# Altium PCB PCB_ControlDevBoard_2024-04-11.pcbdoc
Units mil, origin at the board's own origin, x right, y up, seen from the top; angles counter-clockwise.
Board outline 5143.85 x 4159.6 mil, 2 copper layers (Top Layer, Bottom Layer); 32 components, 65 nets, 148 pads, 4 vias.
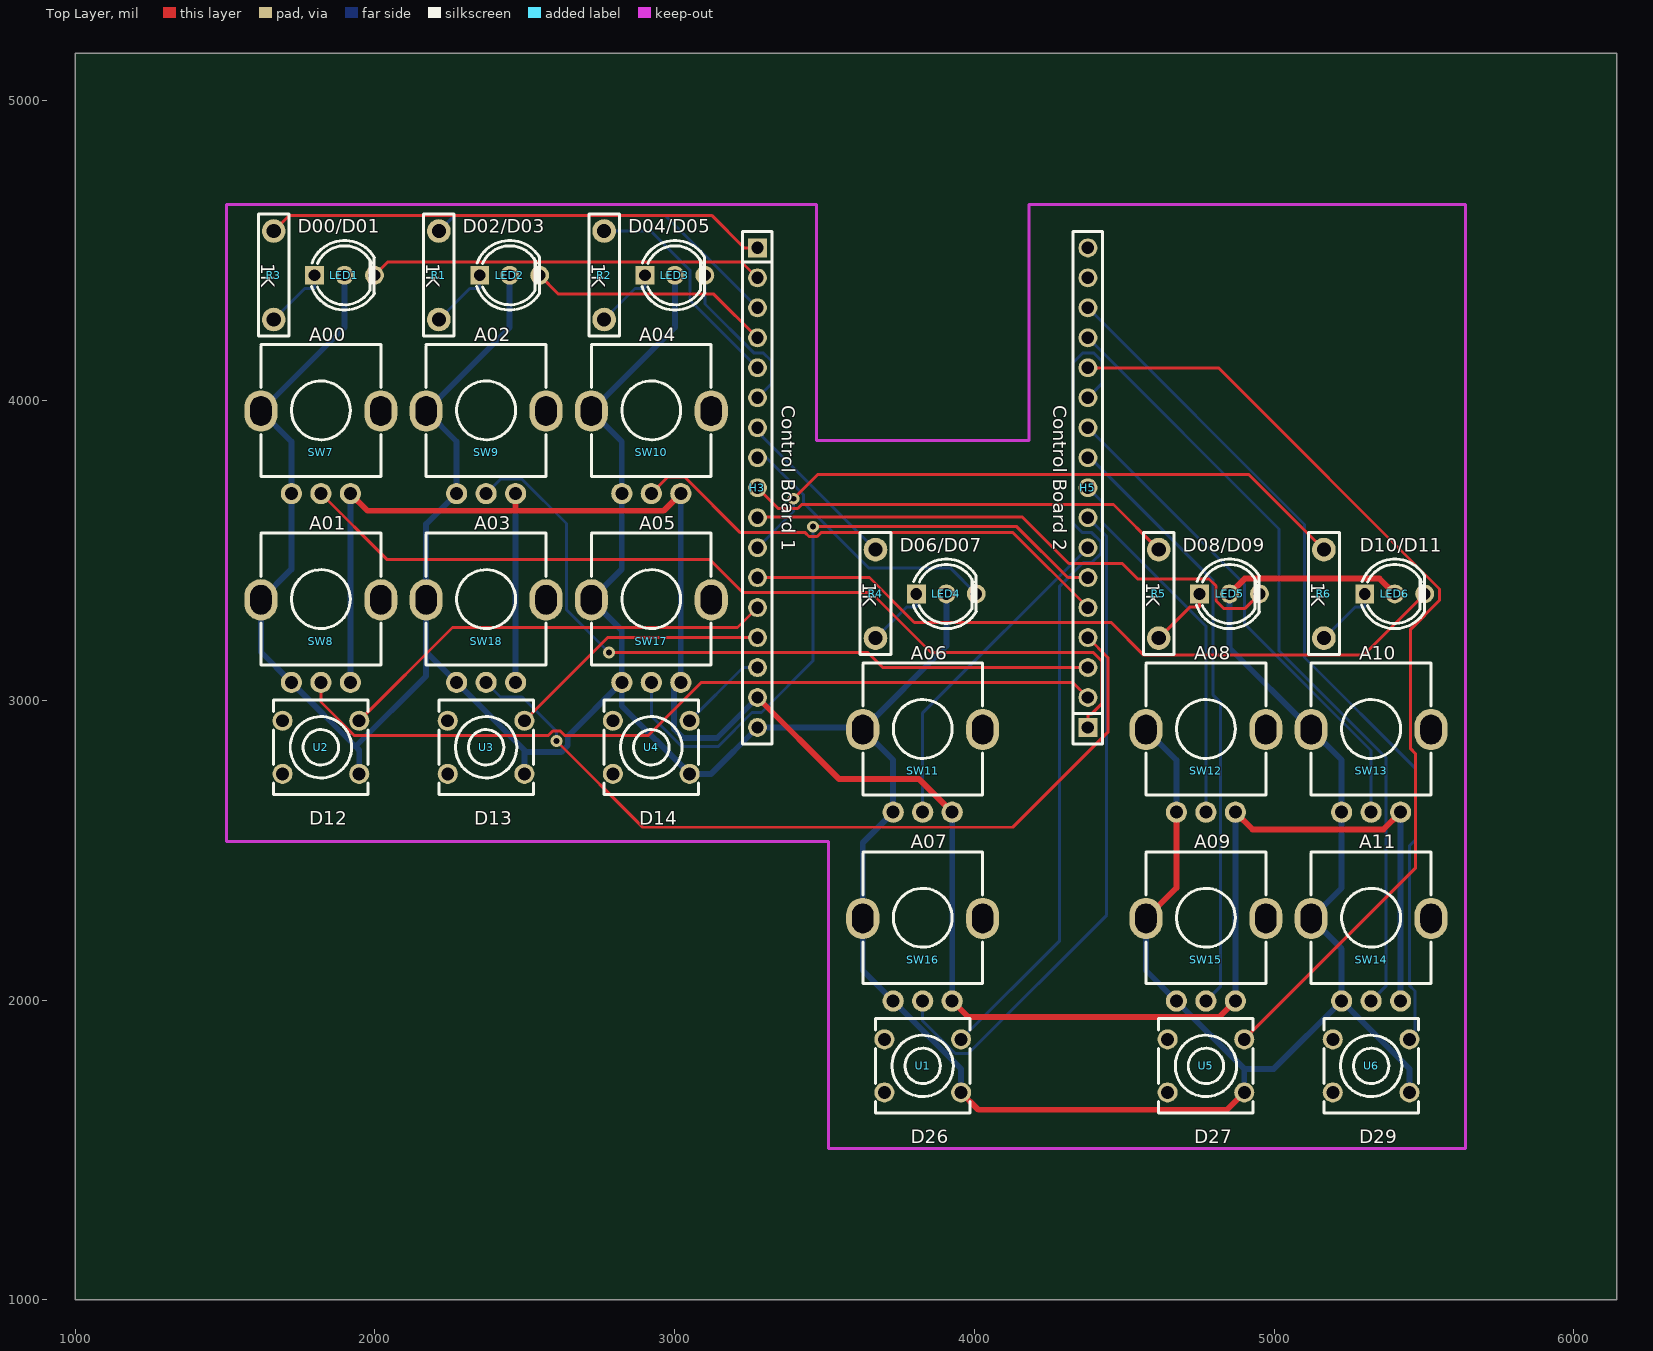
[diagram p0: Top Layer view]
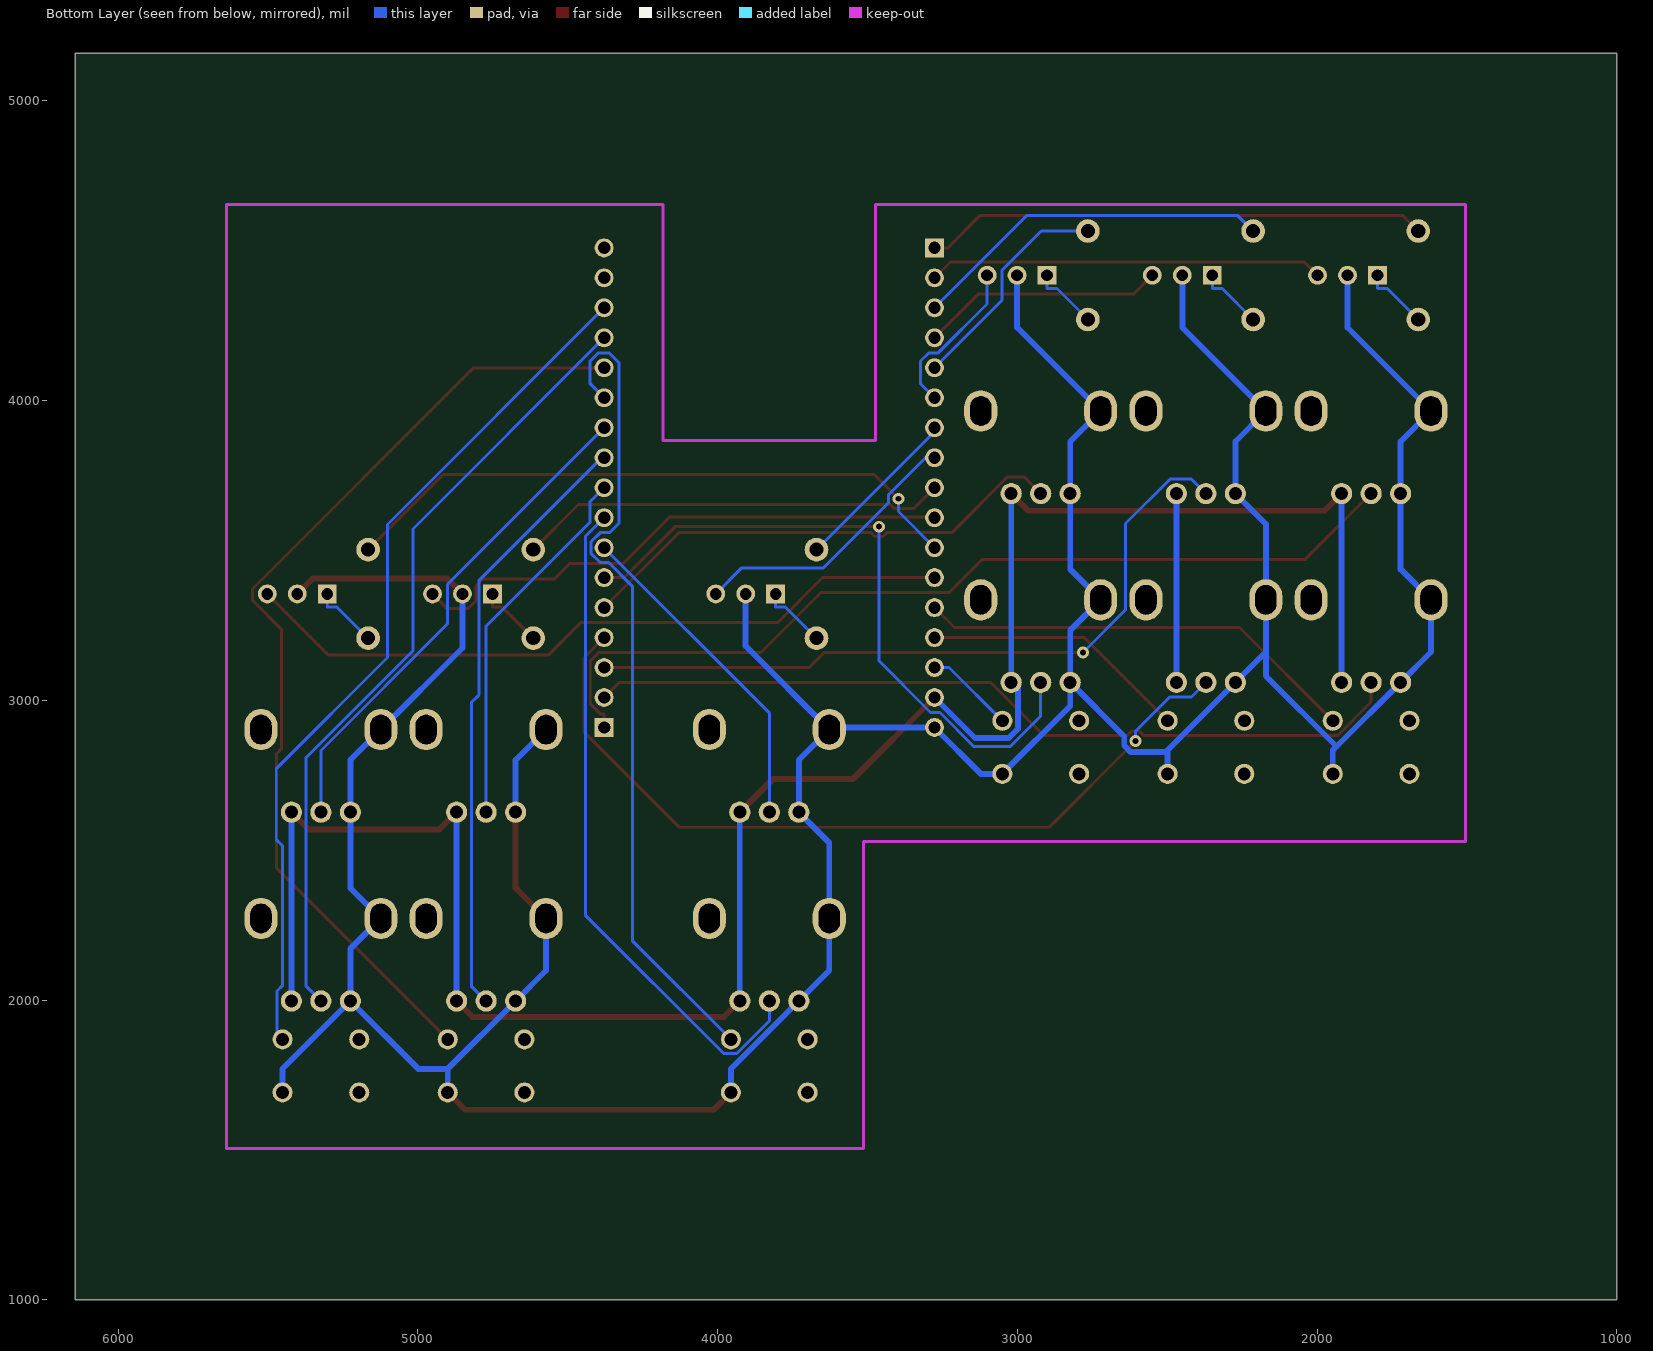
[diagram p1: Bottom Layer view, seen from below]

## Layer stack, top to bottom
Top Solder: solder mask 0.4, Solder Resist, Dk 3.5
Top Layer: signal copper 1.4
Dielectric1: dielectric 12.6, FR-4, Dk 4.8
Bottom Layer: signal copper 1.4
Bottom Solder: solder mask 0.4, Solder Resist, Dk 3.5

## Board outline
6143.85,1000 1000,1000 1000,5159.6 6143.85,5159.6

## Design rules (kind name [scope] priority, off if disabled: settings)
Clearance [All] p1: gap=10 ignorepadtopadclearanceinfootprint=FALSE except(0: Arc-Hole Track-Hole SMDPad-Hole THPad-Hole Via-Hole Fill-Hole Poly-Hole Region-Hole Text-Hole)
PolygonConnect [All] p1: connectstyle=Relief reliefconductorwidth=10 reliefentries=4 polygonreliefangle="90 Angle" airgapwidth=10
RoutingVias [All] p1: holewidth=28 width=50 viastyle="Through Hole" minholewidth=28 minwidth=50 maxholewidth=28 maxwidth=50
SolderMaskExpansion [All] p1: expansion=4 istentingtop=FALSE
Width [All] p1: maxlimit=10 minlimit=10 preferedwidth=10
30 further rules are at their usual default settings.

## Components (designator, comment, footprint, x,y, rotation, side; value= is the part's Value field where it differs from the comment)
H3 "Control Board 1" HDR-TH_17P-P2.54-V-M 3276.65,3709.72 r270 top
H5 "Control Board 2" HDR-TH_17P-P2.54-V-M 4379.01,3709.72 r90 top
LED1 "D00/D01" LED-TH_3P-BD5.9-P2.54-BI 1898.7,4418.38 r0 top
LED2 "D02/D03" LED-TH_3P-BD5.9-P2.54-BI 2449.88,4418.38 r0 top
LED3 "D04/D05" LED-TH_3P-BD5.9-P2.54-BI 3001.06,4418.38 r0 top
LED4 "D06/D07" LED-TH_3P-BD5.9-P2.54-BI 3906.57,3355.39 r0 top
LED5 "D08/D09" LED-TH_3P-BD5.9-P2.54-BI 4851.45,3355.39 r0 top
LED6 "D10/D11" LED-TH_3P-BD5.9-P2.54-BI 5402.63,3355.39 r0 top
R1 "1K" PS-RES-16.5*6.42 2213.66,4418.38 r270 top
R2 "1K" PS-RES-16.5*6.42 2764.84,4418.38 r270 top
R3 "1K" PS-RES-16.5*6.42 1662.48,4418.38 r270 top
R4 "1K" PS-RES-16.5*6.42 3670.35,3355.39 r270 top
R5 "1K" PS-RES-16.5*6.42 4615.23,3355.39 r270 top
R6 "1K" PS-RES-16.5*6.42 5166.41,3355.39 r270 top
SW7 "A00" RES-ADJ-TH_RK09D1130C4G 1819.96,3827.83 r0 top
SW8 "A01" RES-ADJ-TH_RK09D1130C4G 1819.96,3197.91 r0 top
SW9 "A02" RES-ADJ-TH_RK09D1130C4G 2371.14,3827.83 r0 top
SW10 "A04" RES-ADJ-TH_RK09D1130C4G 2922.32,3827.83 r0 top
SW11 "A06" RES-ADJ-TH_RK09D1130C4G 3827.83,2764.84 r0 top
SW12 "A08" RES-ADJ-TH_RK09D1130C4G 4772.71,2764.84 r0 top
SW13 "A10" RES-ADJ-TH_RK09D1130C4G 5323.89,2764.84 r0 top
SW14 "A11" RES-ADJ-TH_RK09D1130C4G 5323.89,2134.92 r0 top
SW15 "A09" RES-ADJ-TH_RK09D1130C4G 4772.71,2134.92 r0 top
SW16 "A07" RES-ADJ-TH_RK09D1130C4G 3827.83,2134.92 r0 top
SW17 "A05" RES-ADJ-TH_RK09D1130C4G 2922.32,3197.91 r0 top
SW18 "A03" RES-ADJ-TH_RK09D1130C4G 2371.14,3197.91 r0 top
U1 "D26" SW-TH_4P-L8.0-W8.0-P6.50-LS4.5 3827.83,1780.59 r0 top
U2 "D12" SW-TH_4P-L8.0-W8.0-P6.50-LS4.5 1819.96,2843.58 r0 top
U3 "D13" SW-TH_4P-L8.0-W8.0-P6.50-LS4.5 2371.14,2843.58 r0 top
U4 "D14" SW-TH_4P-L8.0-W8.0-P6.50-LS4.5 2922.32,2843.58 r0 top
U5 "D27" SW-TH_4P-L8.0-W8.0-P6.50-LS4.5 4772.71,1780.59 r0 top
U6 "D29" SW-TH_4P-L8.0-W8.0-P6.50-LS4.5 5323.89,1780.59 r0 top

## Footprints (in the part's own frame and the unit in brackets; to place one, negate y for a bottom-side part, rotate by r counter-clockwise, add the part's x,y. Pads: shape width x height; smd on the part's side, far side on the other; paste and mask are expansions set on the pad)
HDR-TH_17P-P2.54-V-M [mm]
  rect 1.6x1.6 hole 1.05 paste+0 mask+0.051: 1(-20.32,0)
  round 1.6 hole 1.05 paste+0 mask+0.051: 2(-17.78,0) 3(-15.24,0) 4(-12.7,0) 5(-10.16,0) 6(-7.62,0) 7(-5.08,0) 8(-2.54,0) 9(0,0) 10(2.54,0) 11(5.08,0) 12(7.62,0) 13(10.16,0) 14(12.7,0) 15(15.24,0) 16(17.78,0) 17(20.32,0)
  silkscreen extent -21.71,-1.25 21.71,1.25
LED-TH_3P-BD5.9-P2.54-BI [mm]
  rect 1.6x1.6 hole 1 paste+0 mask+0.051: 1(-2.54,0)
  round 1.6 hole 1 paste+0 mask+0.051: 2(0,0) 3(2.54,0)
  silkscreen extent -2.79,-2.95 2.54,2.95
PS-RES-16.5*6.42 [mm]
  round 2 hole 1.2 paste+0 mask+0.051: 1(-3.749,0) 2(3.749,0)
  silkscreen extent -5.2,-1.3 5.15,1.3
RES-ADJ-TH_RK09D1130C4G [mm]
  round 1.8 hole 1.1 paste+0 mask+0.05: 1(-2.5,-3.5) 2(0,-3.5) 3(2.5,-3.5)
  oval 2.8x3.5 hole 1.8 slot 2.5 at 90 deg paste+0 mask+0.05: 4(-5.08,3.5) 5(5.08,3.5)
  silkscreen extent -5.08,-2.03 5.08,9.14
SW-TH_4P-L8.0-W8.0-P6.50-LS4.5 [mm]
  round 1.7 hole 1.1 paste+0 mask+0.05: 1(-3.25,2.25) 2(3.25,2.25) 3(-3.25,-2.25) 4(3.25,-2.25)
  silkscreen extent -4,-4 4,4

## Via types
v1: diameter 39.37, hole 19.69, Top Layer to Bottom Layer, 4 vias

## Nets (pads, with @x,y where several pads share a name; then routed paths per layer and width w, separated by ;. In a path a pad name is that pad's centre, name@x,y a point inside that pad or via, vN(x,y) a via of type N, cw(c..) or ccw(c..) an arc to the next point about the centre after c; other vN are vias at no path point)
3V3A: H3.16 SW7.3 SW8.3 SW9.3 SW10.3 SW11.3 SW12.3 SW13.3 SW14.3 SW15.3 SW16.3 SW17.3 SW18.3 | length 7894.4
  Top Layer w19.68: SW7.3 1975.57,3632.84 2469.56,3632.84 ; SW9.3 2469.56,3632.84 ; SW10.3 2963.55,3632.84 2469.56,3632.84 ; H3.16 3548.97,2737.4 3815.89,2737.4 SW11.3 ; SW16.3 3979.67,1943.7 4817.71,1943.7 SW15.3 ; SW12.3 4928.41,2569.76 5365.03,2569.76 SW13.3
  Bottom Layer w19.68: SW8.3 SW7.3 ; SW18.3 SW9.3 ; SW10.3 SW17.3 2997.91,3037.28 2997.91,2905.09 3028.66,2874.34 3141.27,2874.34 H3.16 ; SW16.3 SW11.3 ; SW15.3 SW12.3 ; SW14.3 SW13.3
3V3D: H5.17
A00/D15: H5.1 SW7.2 | length 3084.1
  Top Layer w9.84: SW7.2 2039.4,3470.59 3116.42,3470.59 3227.29,3359.72 3655.77,3359.72 3855.77,3159.72 4397.07,3159.72 4425.25,3131.54 4425.25,2989.19 4390.09,2954.03 4379.01,2954.03 H5.1
A01/D16: H5.2 SW8.2 | length 2777.2
  Top Layer w9.84: SW8.2 1819.96,2994.34 1931.83,2882.47 2577.82,2882.47 2592.7,2897.35 2619.65,2897.35 2634.53,2882.47 2911.4,2882.47 3088.1,3059.17 4329.56,3059.17 H5.2
A02/D17: H5.3 SW9.2 | length 2457.7
  Top Layer w9.84: v1(2781.47,3159.76) 3644.47,3159.76 3694.51,3109.72 H5.3
  Bottom Layer w9.84: SW9.2 2420.44,3739.33 2489.72,3739.33 2639.12,3589.93 2639.12,3302.11 v1(2781.47,3159.76)
A03/D18: H5.4 SW18.2 | length 2769.3
  Top Layer w9.84: v1(2606.17,2864.81) 2894.14,2576.84 4128.52,2576.84 4446.78,2895.1 4446.78,3141.95 H5.4
  Bottom Layer w9.84: SW18.2 2419.43,3011.82 2491.5,3011.82 2606.17,2897.15 v1(2606.17,2864.81)
A04/D19: H5.5 SW10.2 | length 1670.3
  Top Layer w9.84: SW10.2 2977.49,3745.2 3033.88,3745.2 3219.36,3559.72 3436.14,3559.72 3448.7,3547.16 3475.65,3547.16 3488.21,3559.72 4129.01,3559.72 H5.5
A05/D20: H5.6 SW17.2 | length 2247
  Top Layer w9.84: v1(3462.17,3579.7) 4141.89,3579.7 4311.87,3409.72 H5.6
  Bottom Layer w9.84: SW17.2 2922.32,2948.16 3023.84,2846.64 3145.67,2846.64 3258.75,2959.72 3289.89,2959.72 3462.17,3132 v1(3462.17,3579.7)
A06/D21: H5.7 SW11.2 | length 1111
  Bottom Layer w9.84: SW11.2 3827.83,2958.54 H5.7
A07/D22: H5.8 SW16.2 | length 2268.5
  Bottom Layer w9.84: SW16.2 3827.83,1930.79 3936.6,1822.02 3980.11,1822.02 4441.61,2283.52 4441.61,3547.12 H5.8
A08/D23: H5.9 SW12.2 | length 1245.8
  Bottom Layer w9.84: H5.9 4425.79,3662.94 4425.79,3594.35 4772.71,3247.43 SW12.2
A09/D24: H5.10 SW15.2 | length 2021.1
  Bottom Layer w9.84: H5.10 4387.1,3809.72 4795.85,3400.97 4795.85,3019.07 4821.88,2993.04 4821.88,2046.29 SW15.2
A10/D25: H5.11 SW13.2 | length 1674.1
  Bottom Layer w9.84: H5.11 4901.41,3387.32 4901.41,3255.8 5323.89,2833.32 SW13.2
A11/D28: H5.14 SW14.2 | length 2644.7
  Bottom Layer w9.84: H5.14 5016.92,3571.81 5016.92,3165.44 5373.08,2809.28 5373.08,2046.31 SW14.2
D00: H3.1 R3.1 | length 1680.8
  Top Layer w9.84: R3.1 1714.8,4618.3 3123.76,4618.3 3232.34,4509.72 H3.1
D01: H3.2 LED1.3 | length 1318.3
  Top Layer w9.84: LED1.3 2043.06,4462.74 3223.63,4462.74 H3.2
D02: H3.3 R1.1 | length 1212.7
  Bottom Layer w9.84: R1.1 2266.19,4618.51 2967.86,4618.51 H3.3
D03: H3.4 LED2.3 | length 813.2
  Top Layer w9.84: LED2.3 2612.83,4355.43 3130.94,4355.43 H3.4
D04: H3.5 R2.1 | length 759.3
  Bottom Layer w9.84: R2.1 2920.21,4565.98 3051.06,4435.13 3051.06,4335.31 H3.5
D05: H3.6 LED3.3 | length 538.3
  Bottom Layer w9.84: LED3.3 3101.06,4322.58 3263.92,4159.72 3295.36,4159.72 3323.06,4132.02 3323.06,4056.13 H3.6
D06: H3.7 R4.1 | length 569.8
  Bottom Layer w9.84: H3.7 3276.65,3896.69 R4.1
D07: H3.8 LED4.3 | length 933.9
  Bottom Layer w9.84: H3.8 3306.4,3809.72 3429.69,3686.43 3429.69,3659.45 3646.68,3442.46 3919.5,3442.46 LED4.3
D08: H3.9 R5.1 | length 1435.5
  Top Layer w9.84: H3.9 3345.96,3640.41 3410.63,3640.41 3424.3,3654.08 4464.14,3654.08 R5.1
D09: H3.10 LED5.3 | length 1852.2
  Top Layer w9.84: H3.10 3279.17,3612.24 4159.96,3612.24 4315.22,3456.98 4493.63,3456.98 4545.18,3405.43 4782.93,3405.43 4806.18,3382.18 4806.18,3332.7 4832.92,3305.96 4902.02,3305.96 LED5.3
D10: H3.11 R6.1 | length 2120.2
  Top Layer w9.84: v1(3397.15,3672.95) 3478.5,3754.3 4915.1,3754.3 R6.1
  Bottom Layer w9.84: H3.11 3397.15,3630.22 v1(3397.15,3672.95)
D11: H3.12 LED6.3 | length 2417.7
  Top Layer w9.84: H3.12 3649.89,3409.72 3799.91,3259.7 4456.95,3259.7 4565.58,3151.07 5298.31,3151.07 LED6.3
D12: H3.13 U2.2 | length 1485.1
  Top Layer w9.84: U2.2 2259.1,3243.34 3210.27,3243.34 H3.13
D13: H3.14 U3.2 | length 892.5
  Top Layer w9.84: U3.2 2776.66,3209.72 H3.14
D14: H3.15 U4.2 | length 299.9
  Bottom Layer w9.84: U4.2 3227.84,3109.72 H3.15
D26: H5.12 U1.2 | length 2788.4
  Bottom Layer w9.84: U1.2 4284.77,2198.15 4284.77,3380.87 4363.62,3459.72 4391.92,3459.72 4423.36,3491.16 4423.36,3528.3 4391.94,3559.72 4360.74,3559.72 4328.66,3591.8 4328.66,4126.1 4362.28,4159.72 4397.72,4159.72 4425.42,4132.02 4425.42,4056.13 H5.12
D27: H5.13 U5.2 | length 3264.3
  Top Layer w9.84: H5.13 4814.5,4109.72 5552.25,3371.97 5552.25,3334.05 5455.91,3237.71 5455.91,2838.65 5471.38,2823.18 5471.38,2439.88 U5.2
D29: H5.15 U6.2 | length 2918.3
  Bottom Layer w9.84: H5.15 5101.72,3587.01 5101.72,3143.33 5472.81,2772.24 5472.81,2535.5 5451.41,2514.1 5451.41,2049.91 5470.73,2030.59 5470.73,1888.05 U6.2
D30: H5.16
GND: H3.17 LED1.2 LED2.2 LED3.2 LED4.2 LED5.2 LED6.2 SW7.1 SW7.4 SW8.1 SW8.4 SW9.1 SW9.4 SW10.1 SW10.4 SW11.1 SW11.4 SW12.1 SW12.4 SW13.1 SW13.4 SW14.1 SW14.4 SW15.1 SW15.4 SW16.1 SW16.4 SW17.1 SW17.4 SW18.1 SW18.4 U1.4 U2.4 U3.4 U4.4 U5.4 U6.4 | length 14923.4
  Top Layer w19.68: U1.4 4013.39,1634.4 4843.05,1634.4 U5.4 ; SW15.4 4674.28,2374.28 SW12.1 ; LED5.2 4902.19,3406.13 5351.89,3406.13 LED6.2
  Bottom Layer w19.68: LED1.2 1898.7,4244.36 SW7.4 1721.53,3864.05 SW7.1 1721.53,3437.27 SW8.4 1619.96,3161.68 SW8.1 1935.64,2846 ; U2.4 1947.91,2833.73 1935.64,2846 ; LED2.2 2449.88,4244.36 SW9.4 2272.71,3864.05 SW9.1 2171.14,3588.46 SW18.4 2171.14,3161.68 ; U3.4 2499.09,2827.35 ; LED3.2 3001.06,4244.36 SW10.4 2823.89,3864.05 SW10.1 2823.89,3437.27 SW17.4 2823.89,3234.13 SW17.1 ; LED4.2 3906.57,3181.37 SW11.4 ; U1.4 3955.78,1770.74 SW16.1 3627.83,2098.69 SW16.4 3627.83,2525.47 SW11.1 3729.4,2801.06 SW11.4 ; SW15.4 4572.71,2098.69 SW15.1 4900.66,1770.74 ; SW12.4 4674.28,2801.06 SW12.1 ; LED5.2 4851.45,3175.07 SW13.4 5225.46,2801.06 SW13.1 5225.46,2374.28 SW14.4 5225.46,2171.14 SW14.1 ; U5.4 4900.66,1770.74 ; U6.4 5451.84,1770.74 SW14.1 ; 1935.64,2846 2171.14,3081.5 2171.14,3161.68 ; 2171.14,3161.68 SW18.1 2499.09,2833.73 2499.09,2827.35 ; 2499.09,2827.35 2621.69,2827.35 2643.63,2849.29 2643.63,2879.85 SW17.1 ; SW17.1 2823.89,2981.38 U4.4 3121.93,2755 H3.17 3620.74,2909.72 SW11.4 ; 4900.66,1770.74 4999.08,1770.74 SW14.1
LED1_1: LED1.1 R3.2 | length 223.3
  Bottom Layer w9.84: R3.2 1765.77,4374.07 1798.7,4374.07 LED1.1
LED3_1: LED3.1 R2.2 | length 223.3
  Bottom Layer w9.84: R2.2 2868.13,4374.07 2901.06,4374.07 LED3.1
LED4_1: LED4.1 R4.2 | length 223.3
  Bottom Layer w9.84: R4.2 3773.64,3311.08 3806.57,3311.08 LED4.1
LED5_1: LED5.1 R5.2 | length 223.3
  Top Layer w9.84: R5.2 4718.52,3311.08 4751.45,3311.08 LED5.1
LED6_1: LED6.1 R6.2 | length 223.3
  Bottom Layer w9.84: R6.2 5269.7,3311.08 5302.63,3311.08 LED6.1
R1_2: LED2.1 R1.2 | length 223.3
  Bottom Layer w9.84: R1.2 2316.95,4374.07 2349.88,4374.07 LED2.1
S$106: 
SW7_5: SW7.5
SW8_5: SW8.5
SW9_5: SW9.5
SW10_5: SW10.5
SW11_5: SW11.5
SW12_5: SW12.5
SW13_5: SW13.5
SW14_5: SW14.5
SW15_5: SW15.5
SW16_5: SW16.5
SW17_5: SW17.5
SW18_5: SW18.5
U1_1: U1.1
U1_3: U1.3
U2_1: U2.1
U2_3: U2.3
U3_1: U3.1
U3_3: U3.3
U4_1: U4.1
U4_3: U4.3
U5_1: U5.1
U5_3: U5.3
U6_1: U6.1
U6_3: U6.3

## Keep-outs
Keep-Out Layer:
  lines w10: 1505,2528.62 1505,4654.56 3473.5,4654.6 3473.5,3867.2 4182.16,3867.2 4182.16,4654.6 5638.85,4654.6 5638.85,1505 3512.87,1505 3512.87,2528.62 1505,2528.62